# Altium PCB 信标底板PCB.PcbDoc
Units mil, origin at the board's own origin, x right, y up, seen from the top; angles counter-clockwise.
Board outline 950 x 920 mil, 4 copper layers (Top Layer, GND, VCC3.3, Bottom Layer), stack 30.634 mil thick; 12 components, 10 nets, 52 pads, 53 vias.
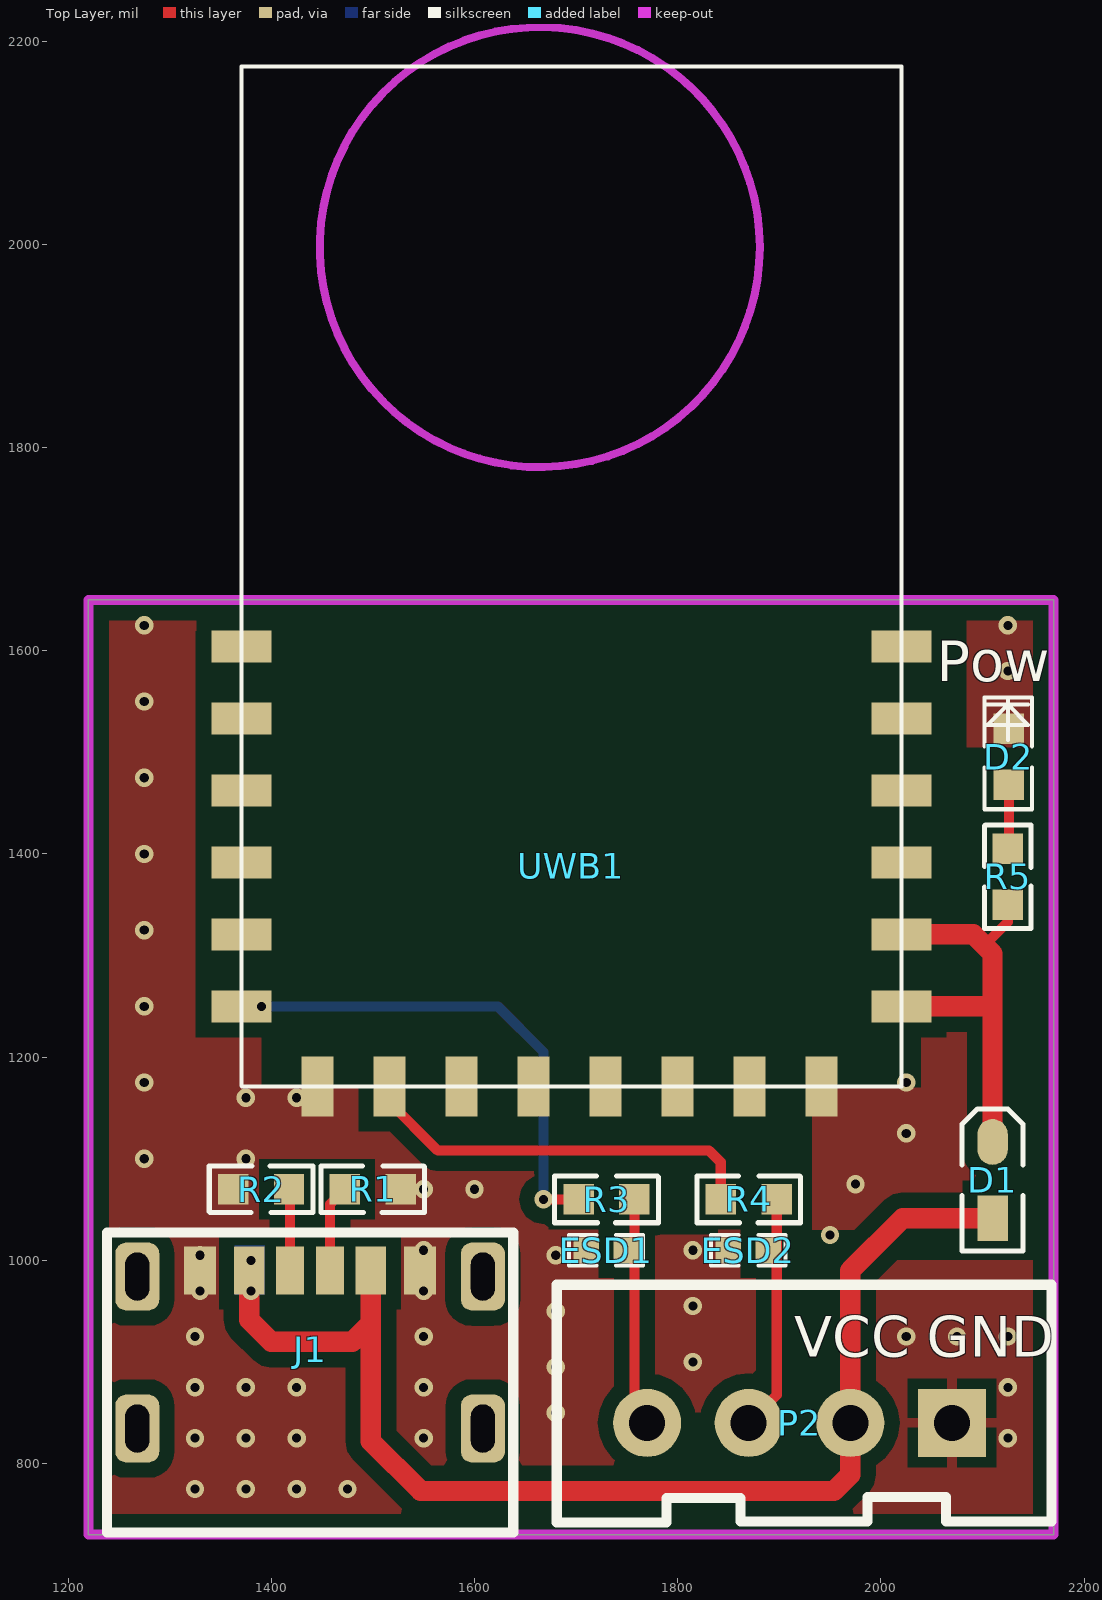
[diagram p0: Top Layer view]
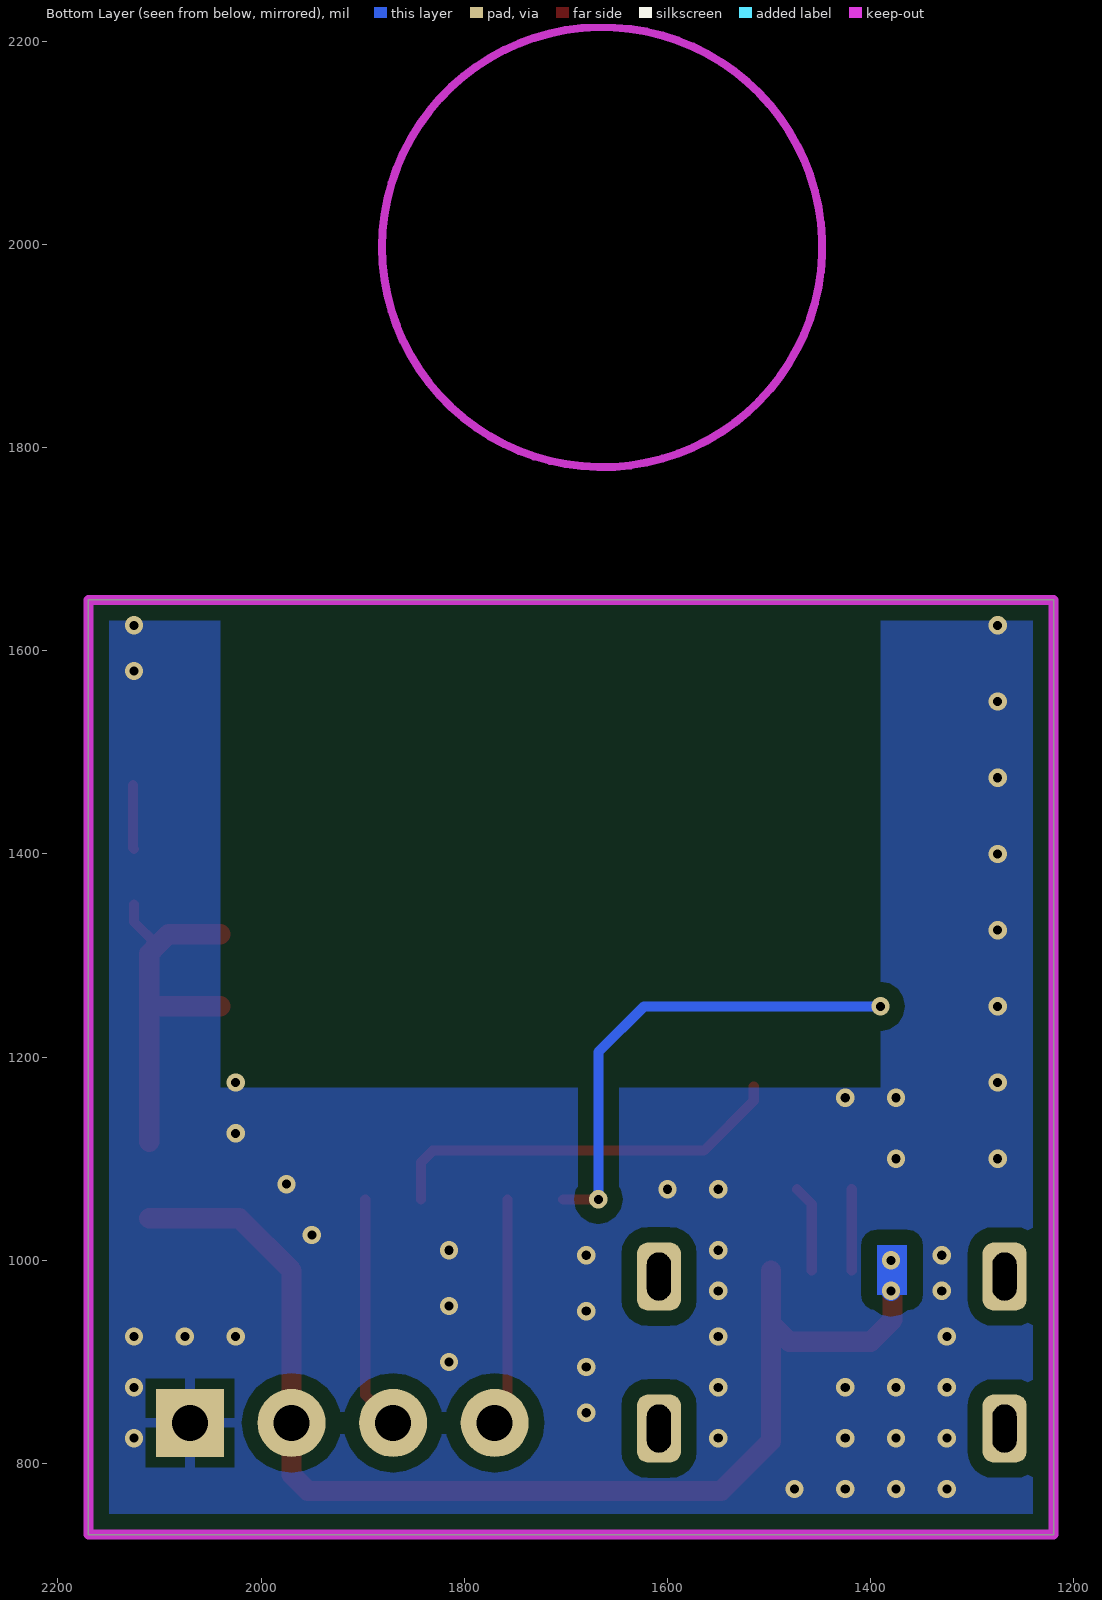
[diagram p1: Bottom Layer view, seen from below]

## Layer stack, top to bottom
Top Solder: solder mask 0.4, Solder Resist, Dk 3.5
Top Layer: signal copper 1.4
Dielectric 1: core 10, FR-4, Dk 4.2
GND: signal copper 1.417
Dielectric 2: core 10, Dk 4.2
VCC3.3: signal copper 1.417
Dielectric 3: prepreg 5, Dk 4.2
Bottom Layer: signal copper 1.4
Bottom Solder: solder mask 0.4, Solder Resist, Dk 3.5

## Board outline
1220,730 2170,730 2170,1650 1220,1650

## Design rules (kind name [scope] priority, off if disabled: settings)
Clearance Clearance_1 [All vs IsVia] p1: gap=10 except(15: Arc-Fill Arc-Poly Track-Fill Track-Poly SMDPad-Fill SMDPad-Poly THPad-Fill THPad-Poly Via-Fill Via-Poly Fill-Fill Fill-Poly Poly-Poly)
Clearance [All] p2: gap=10 except(15: Arc-Fill Arc-Poly Track-Fill Track-Poly SMDPad-Fill SMDPad-Poly THPad-Fill THPad-Poly Via-Fill Via-Poly Fill-Fill Fill-Poly Poly-Poly)
PolygonConnect PolygonConnect_1 [InComponent('DW1','P1','P2','P4','C1','C4','C6','C7','P5','P6')] p1: connectstyle=Relief reliefconductorwidth=10 reliefentries=4 polygonreliefangle="90 Angle" airgapwidth=10
PolygonConnect [All] p2: connectstyle=Direct reliefconductorwidth=10 reliefentries=2 polygonreliefangle="90 Angle" airgapwidth=10
RoutingVias [All] p1: holewidth=28 width=50 viastyle="Through Hole" minholewidth=28 minwidth=50 maxholewidth=28 maxwidth=50
SolderMaskExpansion [All] p1: expansion=4
Width Width_4 [All] p1: maxlimit=100 minlimit=10 preferedwidth=10 minimp=50.000000 maximp=50.000000 favimp=50.000000
Width Width_3 [All] p2: maxlimit=80 minlimit=10 preferedwidth=60 midlayer1_maxwidth=10 midlayer1_prefwidth=10 midlayer2_maxwidth=10 midlayer2_prefwidth=10 minimp=50.000000 maximp=50.000000 favimp=50.000000
Width Width_2 [All] p3: maxlimit=60 minlimit=10 preferedwidth=50 midlayer1_maxwidth=10 midlayer1_prefwidth=10 midlayer2_maxwidth=10 midlayer2_prefwidth=10 minimp=50.000000 maximp=50.000000 favimp=50.000000
Width Width_1 [All] p4: maxlimit=50 minlimit=10 preferedwidth=10 toplayer_maxwidth=10 midlayer1_maxwidth=10 midlayer2_maxwidth=10 minimp=50.000000 maximp=50.000000 favimp=50.000000
Width [All] p5: maxlimit=10 minlimit=10 preferedwidth=10
30 further rules are at their usual default settings.

## Components (designator, comment, footprint, x,y, rotation, side; value= is the part's Value field where it differs from the comment)
D1 "1N4148" SM0805Z_S 2110,1079 r90 top
D2 "LED" LED[0603] 2125,1495 r270 top
ESD1 "PGB1010402" ALX_0402A 1710,1010 r0 top
ESD2 "PGB1010402" ALX_0402A 1850,1010 r0 top
J1 "Type_C-6P" TYPE_C-6P 1330,990 r90 top
P2 "XH2.54_1*4" XH2.54-LI-4P 1920,840 r180 top
R1 "5.1K" ALX_0603A 1500,1070 r180 top
R2 "5.1K" ALX_0603A 1390,1070 r0 top
R3 "200R" ALX_0603A 1730,1060 r180 top
R4 "200R" ALX_0603A 1870,1060 r180 top
R5 "470R" ALX_0603A 2125,1377.5 r270 top
UWB1 "" MK1000 2020.31,1250 r90 top

## Footprints (in the part's own frame and the unit in brackets; to place one, negate y for a bottom-side part, rotate by r counter-clockwise, add the part's x,y. Pads: shape width x height; smd on the part's side, far side on the other; paste and mask are expansions set on the pad)
ALX_0402A [mm]
  rect 0.635x0.635 smd: 1(0,0) 2(1,0)
  silkscreen extent -0.43,-0.38 1.42,0.38
ALX_0603A [mil]
  rect 30x30 smd: 1(-27.5,0) 2(27.5,0)
  silkscreen extent -51,-23 51,23
LED[0603] [mil]
  rect 30x30 smd: 1(27,1) 2(-28,1)
  silkscreen extent -59,-23 51,24, body extent -35,-17 31,19, height 35
MK1000 [mm]
  rect 0.8x1.5 smd: 3(9,16.5) 4(7.2,16.5) 5(5.4,16.5) 7(1.8,16.5) 8(0,16.5) 17(0,0) 18(1.8,0) 19(3.6,0) 20(5.4,0) 21(7.2,0)
  rect 0.8x1.5 smd mask+0.102: 6(3.6,16.5) 22(9,0)
  rect 1.5x0.8 smd: 9(-2,14.6) 10(-2,12.8) 12(-2,9.2) 13(-2,7.4) 14(-2,5.6) 15(-2,3.8) 16(-2,2)
  rect 1.5x0.8 smd mask+0.102: 11(-2,11)
  Keep-Out Layer circle w0.2: c18.98,9.042 r5.5
  silkscreen extent -2,0 23.5,16.5
SM0805Z_S [mil]
  rect 45x30 smd: 1(-37.5,0)
  oval 45x30 smd: 2(37.5,0)
  silkscreen extent -70,-30 70,30
TYPE_C-6P [mm]
  rect 1.2x0.7 smd: A5(0,-2.25) B5(0,-3.25)
  rect 1.2x0.76 smd: A9(0,-4.27) B9(0,-1.23)
  rect 1.2x0.8 smd: A12(0,-5.5) B12(0,0)
  rrect50% 1.7x1.1 hole 0.6 slot 1.2 at 0 deg: ""(-3.95,1.57) ""(-3.95,-7.07) ""(-0.15,1.57) ""(-0.15,-7.07)
  silkscreen extent -6.55,-7.83 0.95,2.33, body extent -6.59,-7.22 0.31,1.72, height 3.18
XH2.54-LI-4P [mm] "接插件，4P"
  rect 1.7x1.7 hole 0.9: 1(-3.81,0)
  round 1.7 hole 0.9: 2(-1.27,0) 3(1.27,0) 4(3.81,0)
  silkscreen extent -6.3,-3.45 6.07,2.49, body extent -6.31,-3.3 6.31,2.4, height 7.03

## Part data
ESD1 ESD2: "Zener Diode"
R1 R2 R3 R4 R5: library part ALX_RES
UWB1: library part MK1000

## Via types
v1: diameter 18, hole 9, Top Layer to Bottom Layer, 53 vias

## Nets (pads, with @x,y where several pads share a name; then routed paths per layer and width w, separated by ;. In a path a pad name is that pad's centre, name@x,y a point inside that pad or via, vN(x,y) a via of type N, cw(c..) or ccw(c..) an arc to the next point about the centre after c; other vN are vias at no path point)
+5V: D1.2 R5.2 UWB1.17 UWB1.18 | length 384.1
  Top Layer w10: 2102,1310 2125,1333 R5.2
  Top Layer w20: UWB1.17@2040,1250 2107,1250 2110,1247 ; UWB1.18@2040,1320.87 2091.13,1320.87 2102,1310 2110,1302 2110,1247 ; D1.2 2110,1247
GND: D2.2 ESD1.1 ESD2.1 J1.A12 J1.B12 P2.1 R1.1 R2.1 UWB1.9 UWB1.16
  other v1: 1325,775 1375,775 1425,775 1475,775 1325,825 1375,825 1425,825 1550,825 2125,825 1680,850 1325,875 1375,875 1425,875 1550,875 2125,875 1680,895 1815,900 1325,925 1550,925 2025,925 2075,925 2125,925 1680,950 1815,955 1330,970 1550,970 1330,1005 1680,1005 1550,1010 1815,1010 1950,1025 1550,1070 1600,1070 1975,1075 1275,1100 1375,1100 2025,1125 1375,1160 1425,1160 1275,1175 2025,1175 1275,1250 1275,1325 1275,1400 1275,1475 1275,1550 2125,1580 1275,1625 2125,1625
NetD2_1: D2.1 R5.1 | length 63.4
  Top Layer w10: R5.1 2126,1406 D2.1
NetJ1_A5: J1.A5 R2.2 | length 80
  Top Layer w10: J1.A5 R2.2@1418.58,1070
NetJ1_B5: J1.B5 R1.2 | length 86
  Top Layer w10: J1.B5 1457.95,1055.45 R1.2
NetR3_2: R3.2 UWB1.8 | length 475.7
  Top Layer w10: v1(1668,1060) R3.2
  Bottom Layer w10: v1(1390.39,1250) 1623,1250 1668,1205 v1(1668,1060)
NetR4_2: R4.2 UWB1.10 | length 403.3
  Top Layer w10: UWB1.10@1515,1171.26 1515,1157 1564,1108 1831,1108 1842.5,1096.5 R4.2
RXD: ESD2.2 P2.3 R4.1 | length 231.4
  Top Layer w10: P2.3 1897.5,867.5 R4.1
TXD: ESD1.2 P2.4 R3.1 | length 225.2
  Top Layer w10: R3.1 1757.5,852.5 P2.4
VIN: D1.1 J1.A9 J1.B9 P2.2 | length 1243.8
  Top Layer w20: J1.B9 1378.43,941.57 1400,920 1480,920 1498.11,938.11 ; J1.A9 1498.11,938.11 ; D1.1 2021.5,1041.5 1970,990 P2.2 1970,789 1954,773 1547,773 1498.11,821.89 1498.11,938.11
  Bottom Layer w20: v1(1380,970) v1(1380,1000)
pads on no net: J1. UWB1.3 UWB1.4 UWB1.5 UWB1.6 UWB1.7 UWB1.11 UWB1.12 UWB1.13 UWB1.14 UWB1.15 UWB1.19 UWB1.20 UWB1.21 UWB1.22

## Polygon pours and split planes (outlines as drawn)
GND on Bottom Layer "GND_L04_P071" (solid, remove dead copper, pour order 71): 1220,730 2170,730 2170,1650 1220,1650
GND on Top Layer "GND_L01_P072" (solid, remove dead copper, pour order 72): 1220,730 2170,730 2170,1650 1220,1650

## Keep-outs
Keep-Out Layer:
  lines w10: 1220,730 2170,730 2170,1650 1290,1650 1220,1650 1220,1100 1220,730

## Other copper
Top Layer:
  pour cut-out: 2070,1505 2155,1505 2155,1503.39 2149.61,1498 2096,1498
  pour cut-out: 2005,1000 2160,1000 2160,1010 2145,1025 2015,1025
  pour cut-out: 2084.53,1629.61 2084.53,1346.36 2063.64,1346.36 1955,1455
  pour cut-out: 1325,1618.98 1325,1219.25 1390,1219.25 1390,1630 1435,1675
  pour cut-out: 1782.99,1025 1840,1025 1840,1035 1830,1045 1775,1045
  pour cut-out: 1897.5,1030 1990,1030 1990,1025 1960,995 1897.5,995
  pour cut-out: 1932.5,1025 1932.5,1197.5 1920,1210 1910,1200 1910,1125
  pour cut-out: 1390,1650 1390,1170 2040,1170 2040,1650
Bottom Layer:
  rectangle net VIN: 1364,966 1394,1015
  pour cut-out: 1390,1650 1390,1170 2040,1170 2040,1650

## Silkscreen, mask and mechanical layers (free items; w line width, h text height)
Top Overlay:
  text "Pow" at 2055,1570 h40
  text "VCC" at 1915,905 h40
  text "GND" at 2045,905 h40